# EAGLE board focuser-no-jumper (EAGLE 6.3)
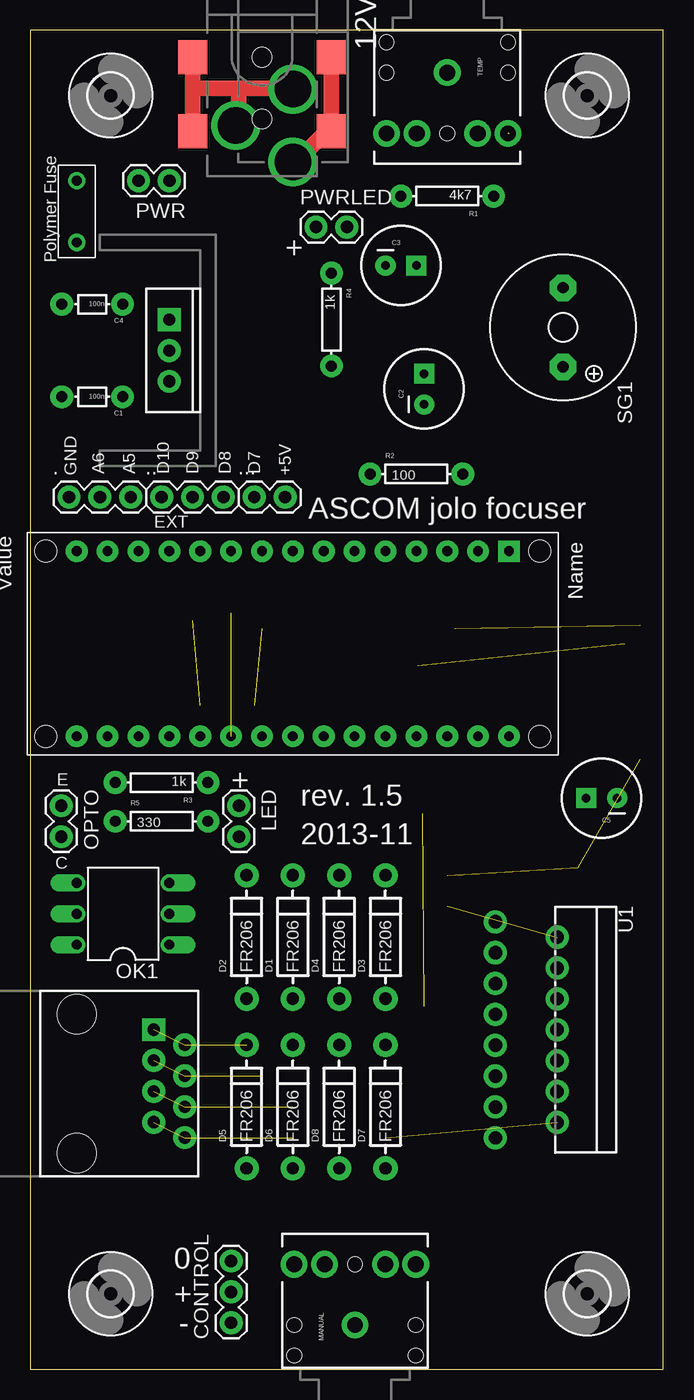
[diagram p0: board, top side]
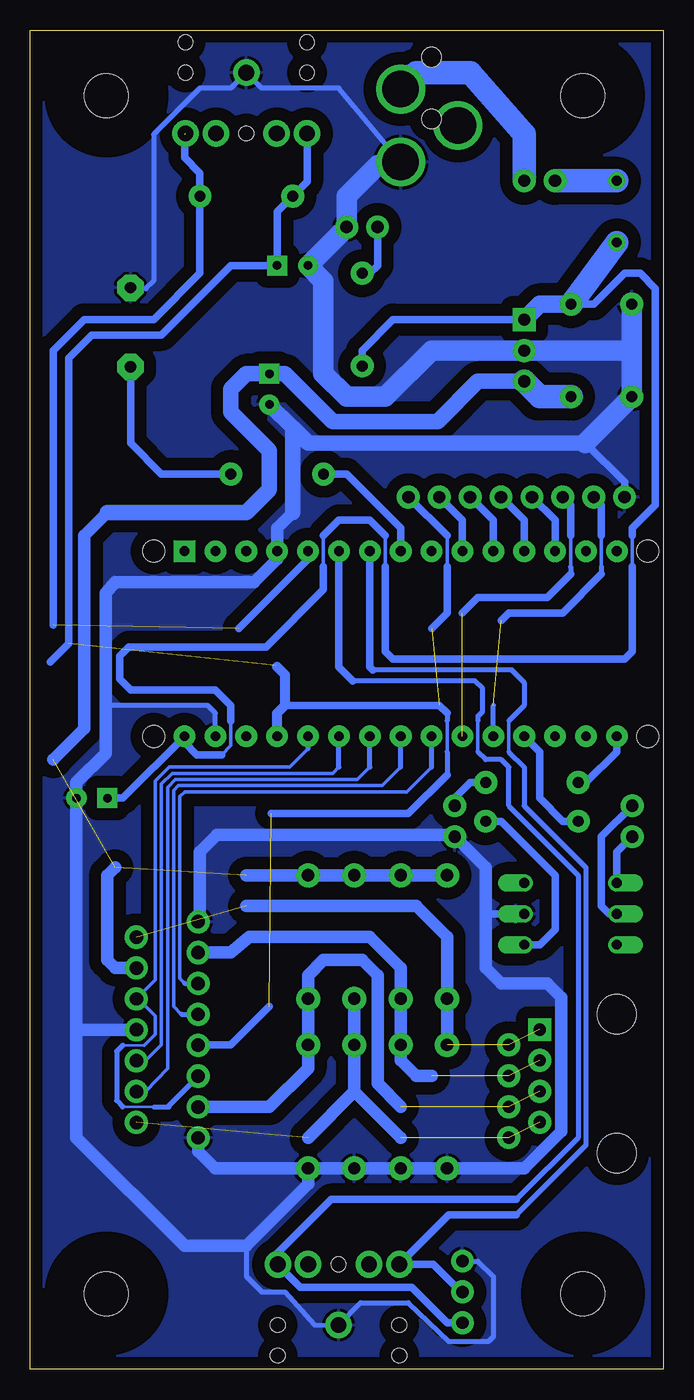
[diagram p1: board, bottom side, seen from below]

Size 52.05 x 110.16 mm. Coordinates in mm from the lower left corner, seen from the top.
Outline: 0,0 52.05,0 52.05,110.16 0,110.16 0,0
Copper layers (1*16): Top 0.035mm / dielectric 1.5mm / Bottom 0.035mm
Design rules "SparkFun": minimum track width 8mil, minimum drill 20mil, track to track 8mil, track to pad 8mil, pad to pad 8mil, via to via 8mil, smd to smd 8mil, copper to edge 10mil, drill to drill 8mil, minimum pad ring 12mil, minimum via ring 10mil, stop-mask expansion 4mil, vias tented up to drill 25mil, thermal gap 10mil
Net classes: 0 default: width 0.254 mm, drill 0.635 mm, clearance 0.203 mm; 1 power: width 0.254 mm, drill 0.635 mm, clearance 0.203 mm

## Footprints (pad centres in the part's own frame; a part is rotated, then mirrored left to right if it is on the bottom)
PTC = drill 0.8: P$1 -2.54,0; P$2 2.54,0
POWER_JACK_COMBO = drill 2.997: GND 5.62,-2.16; GND@1 2.62,2.54; POWER 8.62,2.54 | smd 2.8 x 2.4: GND@3 0,-5.7; GND@4 6.1,-5.7; POWER@1 0,5.7; POWER@2 6.1,5.7 | hole 1.6: 0,0; 5.08,0
1X03 = drill 1.016 pad 1.88: 1 0,0; 2 2.54,0; 3 5.08,0
1X02 = drill 1.016 pad 1.88: 1 0,0; 2 2.54,0
AXIAL-5MM = drill 0.9 pad 1.88: P$1 -2.5,0; P$2 2.5,0
CPOL-RADIAL-100UF-25V = drill 0.7 pad 1.651 square: 1 1.27,0 | drill 0.7 pad 1.651: 2 -1.27,0
DIODE-1N4001 = drill 1 pad 1.981: A -5.08,0; C 5.08,0
TO220-IGO = drill 1 pad 1.88: GND 0,0; OUT 2.54,0 | drill 1 pad 1.88 square: IN -2.54,0
AUDIO-JACK = drill 1.3 pad 2.184: 1 0,0; 2 5,5; 3 5,2.5; 4 5,-2.5; 5 5,-5 | hole 1.2: 0,5; -2.5,5; -2.5,-5; 0,-5; 5,0
PDIP-32 = drill 0.8 pad 1.778: 3V3 15.24,-35.56; +5V 15.24,-10.16; A0 15.24,-12.7; A1 15.24,-15.24; A2 15.24,-17.78; A3 15.24,-20.32; A4 15.24,-22.86; A5 15.24,-25.4; A6 15.24,-27.94; A7 15.24,-30.48; AREF 15.24,-33.02; D0/RX 0,-5.08; D2 0,-12.7; D3 0,-15.24; D4 0,-17.78; D5 0,-20.32; D6 0,-22.86; D7 0,-25.4; D8 0,-27.94; D9 0,-30.48; D10 0,-33.02; D11 0,-35.56; D12 0,-38.1; D13 15.24,-38.1; GND 0,-10.16; GND1 15.24,-5.08; RESET 0,-7.62; RESET1 15.24,-7.62; VIN 15.24,-2.54 | drill 0.8 pad 1.778 square: D1/TX 0,-2.54 | hole 1.778: 0,0; 0,-40.64; 15.24,-40.64; 15.24,0
DIL06 = drill 0.813 offset: 1 -2.54,-3.81; 2 0,-3.81; 3 2.54,-3.81; 4 2.54,3.81; 5 0,3.81; 6 -2.54,3.81
AXIAL-0.3 = drill 0.9 pad 1.88: P$1 -3.81,0; P$2 3.81,0
RJ45-8 = drill 1 pad 1.88 square: 1 -4.445,6.35 | drill 1 pad 1.88: 2 -3.175,8.89; 3 -1.905,6.35; 4 -0.635,8.89; 5 0.635,6.35; 6 1.905,8.89; 7 3.175,6.35; 8 4.445,8.89 | hole 3.2: -5.715,0; 5.715,0
F/QMBIII = drill 0.914 pad 2.159 octagon: + 3.251,0; - -3.251,0
MULTIWATT15 = drill 1.1 pad 1.9: 1 -8.95,-2.39; 2 -7.68,2.69; 3 -6.41,-2.39; 4 -5.14,2.69; 5 -3.87,-2.39; 6 -2.6,2.69; 7 -1.33,-2.39; 8 -0.06,2.69; 9 1.21,-2.39; 10 2.48,2.69; 11 3.75,-2.39; 12 5.02,2.69; 13 6.29,-2.39; 14 7.56,2.69; 15 8.83,-2.39
3,6 = hole 3.6: 0,0

## Placement (x,y rotation side)
0.9A  PolyFuse  [PTC]  3.81,95.25 90 top
12V  Jack 5.5/2.1  [POWER_JACK_COMBO]  19.05,107.95 270 top
.  [1X03]  3.17,71.75 0 top
..  [1X03]  10.79,71.75 0 top
...  [1X02]  18.41,71.75 0 top
C1  100n  [AXIAL-5MM]  5.08,80.01 180 top
C2  470u  [CPOL-RADIAL-100UF-25V]  32.38,80.64 90 top
C3  10u  [CPOL-RADIAL-100UF-25V]  30.48,90.81 0 top
C4  100n  [AXIAL-5MM]  5.08,87.63 180 top
C5  100u  [CPOL-RADIAL-100UF-25V]  46.99,46.99 180 top
CONTROL  J3  [1X03]  16.51,3.81 90 top
D1  FR206  [DIODE-1N4001]  21.59,35.56 90 top
D2  FR206  [DIODE-1N4001]  17.78,35.56 90 top
D3  FR206  [DIODE-1N4001]  29.21,35.56 90 top
D4  FR206  [DIODE-1N4001]  25.4,35.56 90 top
D5  FR206  [DIODE-1N4001]  17.78,21.59 90 top
D6  FR206  [DIODE-1N4001]  21.59,21.59 90 top
D7  FR206  [DIODE-1N4001]  29.21,21.59 90 top
D8  FR206  [DIODE-1N4001]  25.4,21.59 90 top
IC1  78xx  [TO220-IGO]  11.43,83.82 270 top
LED  [1X02]  17.14,46.35 270 top
MANUAL  Jack 3.5mm  [AUDIO-JACK]  26.7,3.63 90 top
NANO  MMduino  [PDIP-32]  41.91,67.31 270 top
OK1  4N35  [DIL06]  7.62,37.47 90 top
OPTO  [1X02]  2.54,46.35 270 top
PWR  [1X02]  11.43,97.79 180 top
PWRLED  [1X02]  23.5,93.98 0 top
R1  4k7  [AXIAL-0.3]  34.29,96.52 180 top
R2  100  [AXIAL-0.3]  31.75,73.66 0 top
R3  1k  [AXIAL-0.3]  10.79,48.26 180 top
R4  1k  [AXIAL-0.3]  24.77,86.36 270 top
R5  330  [AXIAL-0.3]  10.79,45.09 0 top
RJ45  Stepper  [RJ45-8]  3.81,23.5 270 top
SG1  Buzzer  [F/QMBIII]  43.81,85.72 270 top
TEMP  Jack 3.5mm  [AUDIO-JACK]  34.29,106.68 270 top
U1  L298  [MULTIWATT15]  40.64,27.86 270 top
U$2  [3,6]  6.6,6.2 0 top
U$3  [3,6]  45.8,6.2 0 top
U$4  [3,6]  45.8,104.8 0 top
U$5  [3,6]  6.6,104.8 0 top

## Library data of the parts
0.9A 12V . .. ... C1-C5 CONTROL D1-D8 IC1 LED MANUAL OPTO PWR PWRLED R1-R5 RJ45 TEMP U1 = SparkFun
NANO = jet-lib; NAM: Arduino NANO
OK1 = optocoupler; MF: FAIRCHILD SEMICONDUCTOR; MPN: 4N35; OC_FARNELL: 1328375; OC_NEWARK: 72K9946
SG1 = buzzer; OC_FARNELL: unknown; OC_NEWARK: unknown
U$2-U$5 = holes

## Nets
+5: ....2 C3.1 NANO.+5V R1.P$2 TEMP.5 U1.9
GND [power]: 12V.POWER ..1 C1.P$2 C2.2 C3.2 C4.P$2 C5.2 CONTROL.3 D5.A D6.A D7.A D8.A IC1.GND LED.2 MANUAL.1 NANO.GND NANO.GND1 OK1.2 PWRLED.2 SG1.- TEMP.1 U1.1 U1.8 U1.15
N$1: R2.P$2 SG1.+
N$3: NANO.A0 U1.6 U1.11
N$4: NANO.A4 U1.5
N$5: NANO.A3 U1.7
N$7 [power]: 0.9A.P$2 PWR.2
N$8: ....1 NANO.D7
N$9 [power]: 0.9A.P$1 C4.P$1 C5.1 IC1.IN NANO.VIN R4.P$2
N$10 [power]: D4.A D8.C RJ45.7 RJ45.8 U1.14
N$12: ..3 NANO.A5
N$13: NANO.A1 U1.10
N$14 [power]: D1.A D6.C RJ45.3 RJ45.4 U1.3
N$15: NANO.A2 U1.12
N$16 [power]: D2.A D5.C RJ45.1 RJ45.2 U1.2
N$17: NANO.D2 R1.P$1 TEMP.2
N$18: CONTROL.2 MANUAL.2 NANO.D4
N$20 [power]: PWRLED.1 R4.P$1
N$21 [power]: D3.A D7.C RJ45.5 RJ45.6 U1.13
N$24: CONTROL.1 MANUAL.5 NANO.D3
N$25: ..2 NANO.A6
N$28: NANO.D13 R3.P$2
N$29: LED.1 R3.P$1
N$32: ...3 NANO.D8
N$33: ...2 NANO.D9
N$34: ...1 NANO.D10
N$35: NANO.D5 R2.P$1
N$36: NANO.A7 R5.P$1
N$37: OK1.1 R5.P$2
N$38: OK1.4 OPTO.2
N$39: OK1.5 OPTO.1
VCC [power]: 12V.GND@1 PWR.1
VCC2 [power]: C1.P$1 C2.1 D1.C D2.C D3.C D4.C IC1.OUT U1.4

## Tracks (layer width: path | path; a pad name or v marks a point on that pad's centre or on a via)
+5  (3 unrouted)
  Bottom 0.305: 17.78,53.34 17.78,50.8 | 38.23,26.67 U1.9 | 17.78,68.58 17.78,66.04
  Bottom 0.406: 17.78,53.98 17.78,53.34 | 17.78,50.8 17.78,48.9 | 31.88,57.91 31.75,57.78
  Bottom 0.61: 31.11,54.61 18.41,54.61 17.78,53.98 | 17.78,48.9 20.95,45.72 32.26,45.72 | TEMP.5 29.29,97.71 R1.P$2 31.75,95.25 C3.1 35.56,90.81 41.27,85.09 46.99,85.09 48.9,83.19 48.9,59.69 50.42,58.17 | 32.38,29.84 35.56,26.67 38.23,26.67 | ....2 17.78,68.58 | 17.78,66.04 17.78,62.23 19.05,60.96
  Bottom 0.813: NANO.+5V 31.75,53.98 31.11,54.61 31.11,57.15 31.75,57.78
GND
  Bottom 0.406: CONTROL.3 15.24,8.89 13.97,7.62 13.97,2.67 14.35,2.29 17.65,2.29 20.95,5.46 24.89,5.46 MANUAL.1 28.7,3.63 31.11,6.35 33.02,6.35 34.29,7.62 34.29,10.16 | NANO.GND1 36.83,53.98 37.47,54.61 45.85,54.61 | 21.86,99.06 12V.POWER 26.67,105.41 33.02,105.41 TEMP.1 35.56,105.41 38.1,105.41 41.91,101.6 41.91,89.53 42.55,88.9 43.74,88.9 SG1.-
  Bottom 0.61: OK1.2 14.61,37.47 | ..1 3.17,72.98 6.39,76.2
  Bottom 1.016: U1.15 38.25,17.93 36.83,16.51 D7.A | 48.26,27.94 C5.2 48.26,48.26 45.85,50.67 45.85,54.61 45.85,63.88 45.09,64.77 33.66,64.77 31.75,66.67 NANO.GND 31.75,69.22 30.48,70.48 | 48.26,27.94 48.26,19.05 39.37,10.16 34.29,10.16 29.21,15.24 D7.A | 17.02,43.94 36.7,43.94 38.1,42.55 38.1,36.83 | U1.8 48.24,27.92 48.26,27.94 | D7.A D8.A D6.A D5.A 11.43,16.51 8.38,19.56 8.38,30.61 9.53,31.75 13.34,31.75 14.61,33.02 14.61,37.47 14.61,41.27 LED.2
  Bottom 1.27: C2.2 30.48,77.47 | 30.48,77.47 29.21,76.2 6.39,76.2 | 30.48,70.48 30.48,77.47
  Bottom 1.676: 2.58,83.82 C1.P$2 6.39,76.2 | 2.58,83.82 C4.P$2 | 2.58,83.82 IC1.GND 19.05,83.82 22.86,80.01 26.04,80.01 27.94,81.92 27.94,89.53 C3.2 PWRLED.2 26.04,96.52 23.5,99.06 21.86,99.06
  pour Bottom (isolate 1.016): 0,109.86 52.07,109.86 52.07,0 0,0
N$1
  Bottom 0.61: R2.P$2 41.27,73.66 43.81,76.2 SG1.+
N$3
  Bottom 0.203: 42.67,26.64 44.45,26.64 | 44.46,21.57 41.91,21.59 41.89,21.57
  Bottom 0.254: 40.64,21.57 40.64,21.72
  Bottom 0.305: 29.21,51.05 30.73,49.53 40.64,49.53 41.78,48.39 41.78,32.01 U1.6 43.16,30.46 41.78,29.08 41.78,27.56 42.67,26.64
  Bottom 0.406: 29.21,51.05 NANO.A0 | 44.45,26.64 44.96,26.16 44.96,22.1 44.46,21.57 | 41.89,21.57 40.64,21.57 | 40.64,21.72 U1.11
N$4
  Bottom 0.305: 39.37,31.75 39.75,32.13 39.75,47.12 39.37,47.5 21.08,47.5 19.05,49.53 | 38.27,31.75 U1.5
  Bottom 0.406: 39.37,31.75 38.27,31.75 | 19.05,49.53 NANO.A4
N$5
  Bottom 0.305: 39.62,29.21 40.26,29.84 40.26,47.62 39.88,48.01 23.11,48.01 21.59,49.53 | 38.27,29.21 U1.7
  Bottom 0.406: 39.62,29.21 38.27,29.21 | 21.59,49.53 NANO.A3
N$7
  Bottom 1.93: 0.9A.P$2 PWR.2
N$8
  Bottom 0.61: NANO.D7 16.51,69.85 ....1
N$9
  Bottom 0.254: NANO.VIN 39.37,51.56
  Bottom 0.305: 36.32,50.55 35.56,51.31 35.56,53.34 | 27.94,66.04 27.94,68.58 | 22.86,68.58 22.86,66.04 | 2.54,66.04 2.54,68.58
  Bottom 0.61: C5.1 44.45,46.99 NANO.VIN | 39.37,51.56 38.35,50.55 36.32,50.55 | 27.94,66.04 27.94,64.14 32.64,59.44 43.94,59.44 44.7,58.67 44.7,56.77 43.81,55.88 36.83,55.88 35.56,54.61 35.56,53.34 | 27.94,68.58 26.67,69.85 24.13,69.85 22.86,68.58 | C4.P$1 5.71,87.63 3.17,90.17 1.91,90.17 0.64,88.9 0.64,71.12 2.54,69.22 2.54,68.58 | R4.P$2 24.77,83.82 22.23,86.36 IC1.IN | 22.86,66.04 22.86,59.05 22.23,58.42 3.17,58.42 2.54,59.05 2.54,66.04
  Bottom 1.422: C4.P$1 10.16,87.63 IC1.IN
  Bottom 1.93: 0.9A.P$1 C4.P$1
N$10  (3 unrouted)
  Bottom 1.016: 21.59,19.05 25.4,22.86 | 25.4,22.86 29.21,19.05 | D4.A D8.C 25.4,22.86
N$12  (1 unrouted)
  Bottom 0.305: 7.62,68.58 7.62,66.04
  Bottom 0.406: 7.62,66.04 7.62,65.41
  Bottom 0.61: ..3 7.62,71.12 7.62,68.58 | 7.62,65.41 9.53,63.5 15.24,63.5 16.51,62.23
N$13
  Bottom 0.305: U1.10 43.31,25.4 42.55,25.4 41.27,26.67 41.27,48.13 40.39,49.02 27.18,49.02 26.67,49.53
  Bottom 0.406: 26.67,49.53 NANO.A1
N$14  (2 unrouted)
  Bottom 0.406: 38.23,34.29 U1.3
  Bottom 1.016: 38.23,34.29 35.56,34.29 34.04,35.56 24.13,35.56 21.59,33.02 D1.A D6.C 21.59,25.4 20.32,24.13 19.05,24.13
N$15
  Bottom 0.305: U1.12 43.31,22.86 42.55,22.86 40.77,24.77 40.77,47.88 40.13,48.51 25.15,48.51 24.13,49.53
  Bottom 0.406: 24.13,49.53 NANO.A2
N$16  (3 unrouted)
  Bottom 1.016: 34.29,38.1 20.32,38.1 17.78,35.56 D2.A D5.C
N$17  (2 unrouted)
  Bottom 0.61: 39.37,101.6 39.37,99.69 38.1,98.42 R1.P$1 38.1,90.17 41.91,86.36 47.62,86.36 50.16,83.82 50.16,61.21 | NANO.D2 29.21,66.67 34.92,60.96
N$18
  Bottom 0.305: 12.7,53.34 12.7,50.8
  Bottom 0.406: CONTROL.2 16.67,6.35 16.67,6.38 | 12.06,12.7 6.35,18.41 6.35,41.27 11.43,46.35 11.43,49.53 12.7,50.8 | 23.88,57.53 12.45,57.53 11.43,56.52 11.43,54.61 12.7,53.34
  Bottom 0.61: 16.67,6.38 18.92,8.64 MANUAL.2 17.63,12.7 12.06,12.7 | NANO.D4 24.13,57.78 23.88,57.53
N$20
  Bottom 0.61: R4.P$1 24.13,90.17 23.5,90.81 PWRLED.1
N$21  (2 unrouted)
  Bottom 0.406: 38.23,21.59 U1.13
  Bottom 1.016: 21.59,21.59 23.5,23.5 23.5,32.38 24.77,33.66 27.94,33.66 29.21,32.38 D3.A D7.C 29.21,24.77 32.38,21.59 38.23,21.59
N$24
  Bottom 0.305: 15.24,53.34 15.24,50.8
  Bottom 0.406: 15.24,53.34 15.24,53.72 14.86,54.1 14.86,56.01 15.49,56.64 25.53,56.64 | 12.06,13.97 6.99,19.05 6.99,40.64 12.7,46.35 12.7,49.53 13.34,50.16 14.61,50.16 15.24,50.8 | MANUAL.5 31.75,8.63
  Bottom 0.61: CONTROL.1 17.78,3.81 20.7,6.73 29.84,6.73 30.61,7.46 MANUAL.5 | NANO.D3 26.67,57.78 25.53,56.64 | 12.06,13.97 27.3,13.97 31.75,9.53 31.75,8.63
N$25  (1 unrouted)
  Bottom 0.305: 5.08,68.58 5.08,66.04
  Bottom 0.406: NANO.A6 13.97,54.61 | 5.08,66.04 5.08,65.41
  Bottom 0.61: ..2 5.08,71.12 5.08,68.58 | 5.08,65.41 8.26,62.23 12.7,62.23 13.34,61.59
N$28
  Bottom 0.61: NANO.D13 3.81,50.8 6.35,48.26 R3.P$2
N$29
  Bottom 0.61: LED.1 17.14,46.99 15.88,48.26 R3.P$1
N$32
  Bottom 0.61: NANO.D8 13.97,69.85 ...3
N$33
  Bottom 0.61: NANO.D9 11.43,69.85 ...2
N$34
  Bottom 0.61: NANO.D10 8.89,69.85 ...1
N$35
  Bottom 0.61: NANO.D5 21.59,69.22 26.04,73.66 R2.P$1
N$36
  Bottom 0.61: R5.P$1 8.26,45.09 10.16,46.99 10.16,50.8 NANO.A7
N$37
  Bottom 0.61: R5.P$2 13.34,45.09 8.89,40.64 8.89,36.2 10.16,34.92 OK1.1
N$38
  Bottom 0.61: OK1.4 3.81,42.55 OPTO.2
N$39
  Bottom 0.61: OPTO.1 5.08,43.81 5.08,38.1 4.45,37.47 OK1.5
VCC
  Bottom 1.93: PWR.1 11.43,101.6 15.88,106.68 20.32,106.68 12V.GND@1
VCC2  (2 unrouted)
  Bottom 0.406: 43.35,33.02 U1.4
  Bottom 1.016: 50.16,50.16 47.62,52.7 47.62,68.58 45.72,70.48 | 45.09,41.27 45.72,40.64 45.72,33.66 45.09,33.02 43.35,33.02 | D2.C D1.C D4.C D3.C 34.29,40.64
  Bottom 1.27: IC1.OUT 15.24,81.28 18.54,77.98 27.18,77.98 31.11,81.92 C2.1 34.29,81.92 35.56,80.64 35.56,78.74 32.38,75.56 32.38,72.39 34.29,70.48 45.72,70.48
  Bottom 1.93: C1.P$1 10.16,80.01 IC1.OUT

## Text on the board
tNames: Polymer Fuse | + | GND | A6 | A5 | D10 | D9 | D8 | D7 | +5V | ASCOM jolo focuser | EXT | E | + | rev. 1.5 | 2013-11 | C | 0 | + | -